# Altium PCB PCB2.PcbDoc
Units mm, origin at the board's own origin, x right, y up, seen from the top; angles counter-clockwise.
Board outline 65 x 100 mm, 2 copper layers (Top Layer, Bottom Layer); 43 components, 36 nets, 170 pads, 99 vias.
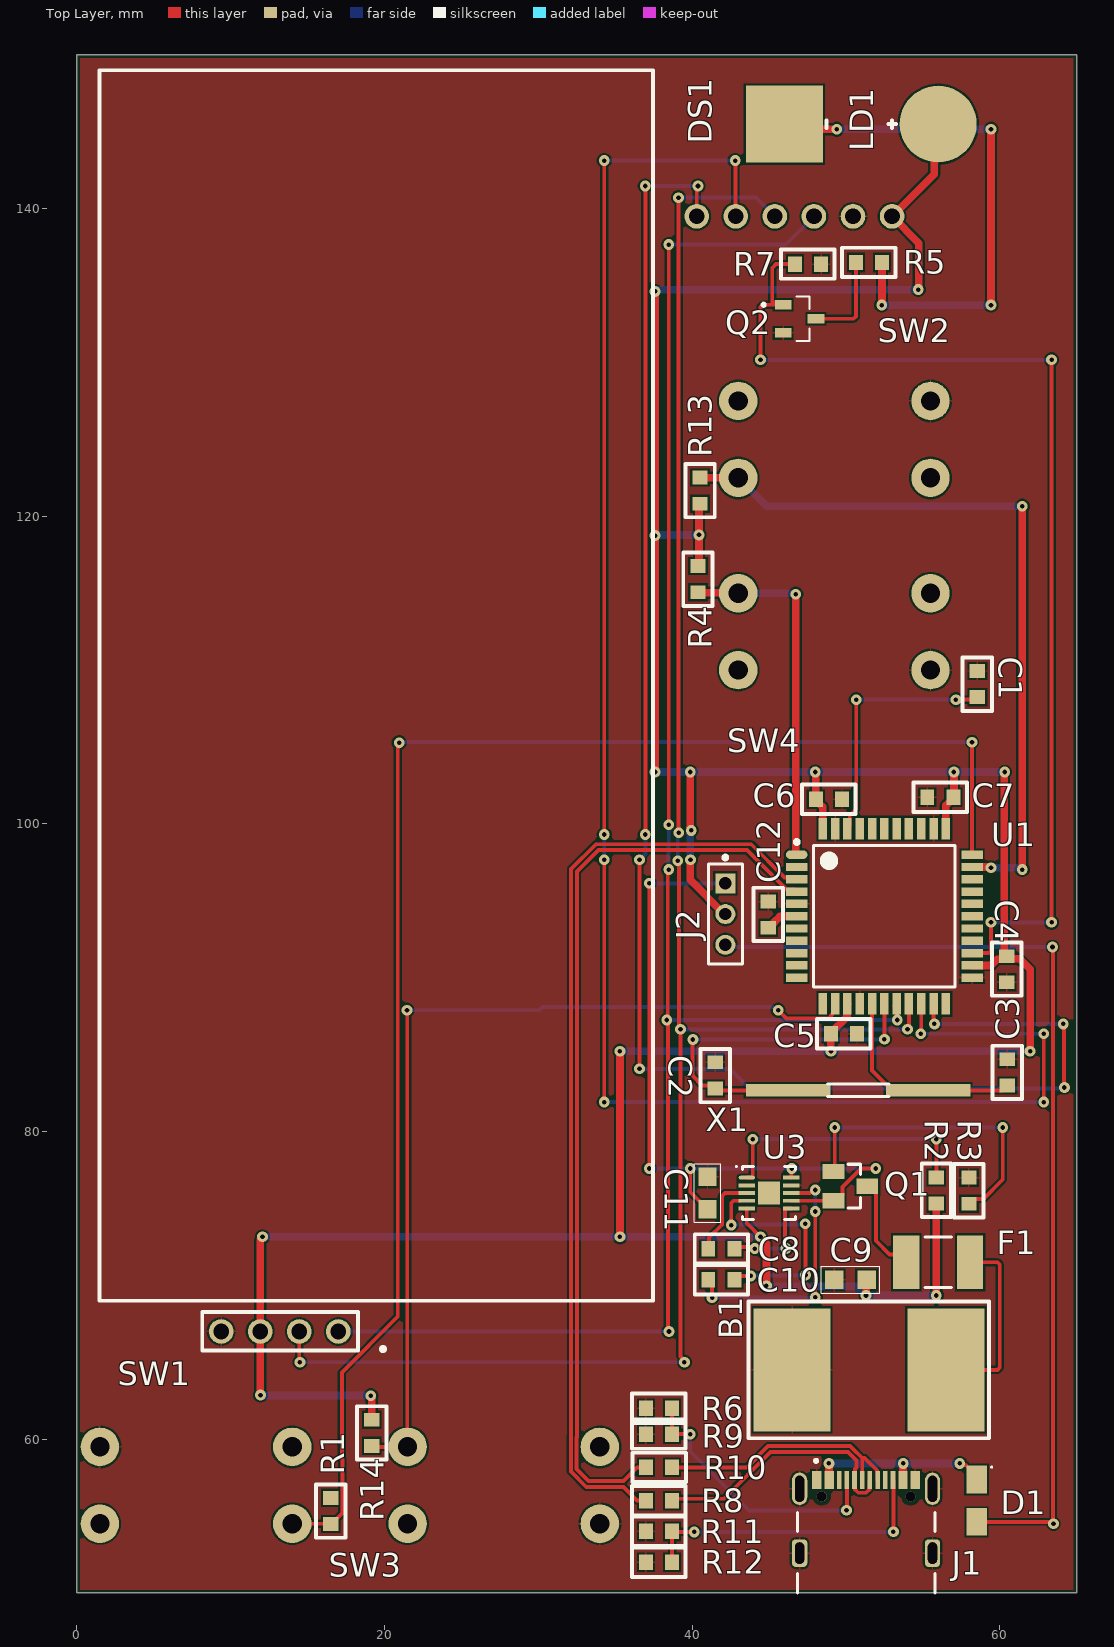
[diagram p0: Top Layer view]
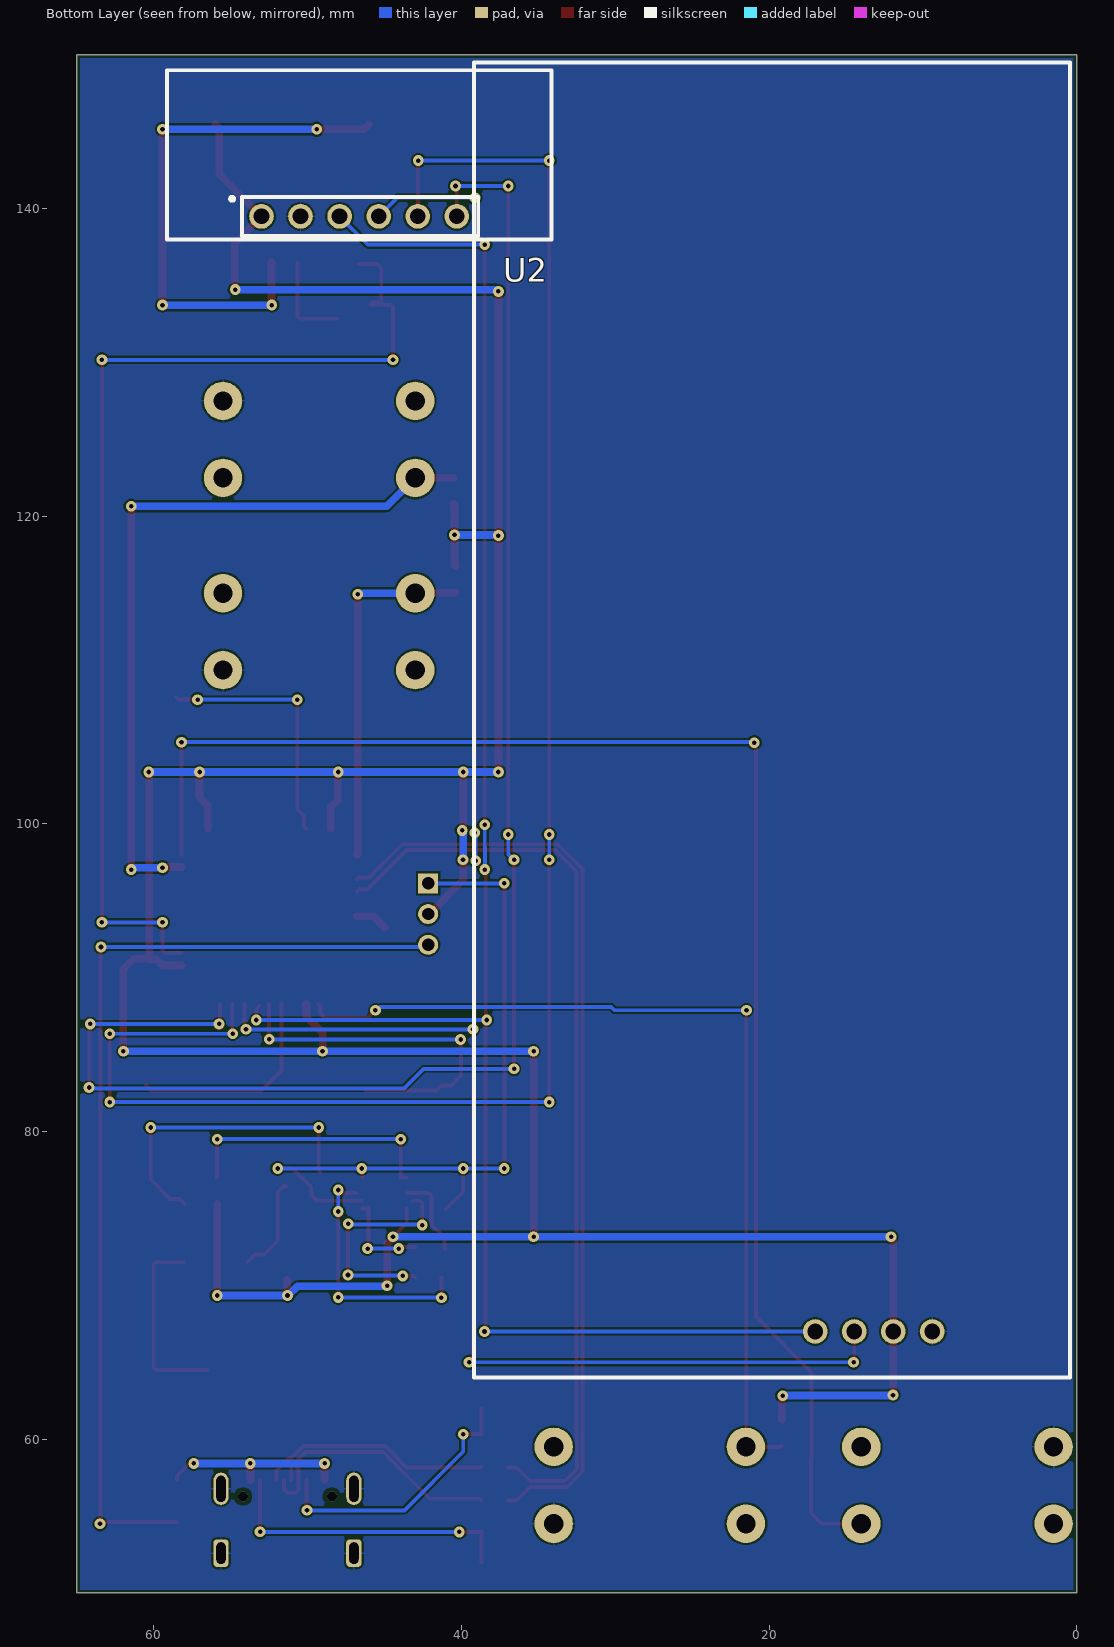
[diagram p1: Bottom Layer view, seen from below]
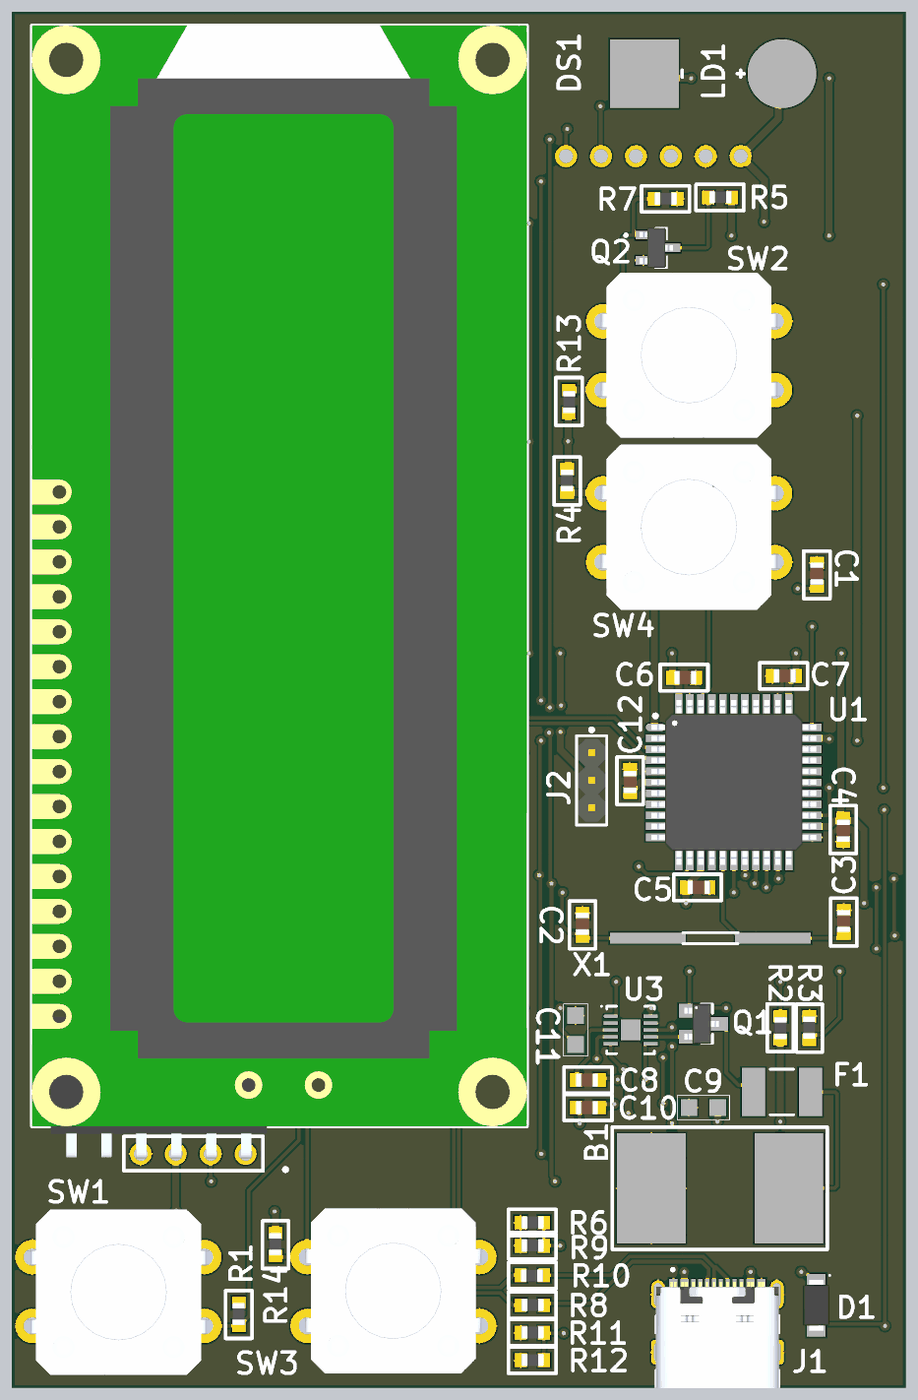
[diagram p2: 3D render of the assembled board from above, using the file's embedded part models]

## Layer stack, top to bottom
Top Solder: solder mask 0.0102, Solder Resist, Dk 3.5
Top Layer: signal copper 0.0356
Dielectric 1: dielectric 0.32, FR-4, Dk 4.8
Bottom Layer: signal copper 0.0356
Bottom Solder: solder mask 0.0102, Solder Resist, Dk 3.5

## Board outline
0,50 65,50 65,150 0,150

## Design rules (kind name [scope] priority, off if disabled: settings)
BoardOutlineClearance [All] p1: gap=0.2 ignorepadtopadclearanceinfootprint=FALSE
Clearance [All] p1: gap=0.127 ignorepadtopadclearanceinfootprint=TRUE except(0.254: Arc-Hole Track-Hole SMDPad-Hole THPad-Hole Via-Hole Fill-Hole Poly-Hole Region-Hole Text-Hole)
ComponentClearance [All] p1: gap=0.127 collisioncheckmode=3 verticalgap=0.127 showdistances=TRUE
DiffPairsRouting [All] p1: maxlimit=0.254 minlimit=0.127 mostfreqgap=0.127 toplayer_minwidth=0.127 toplayer_maxwidth=25.4 toplayer_prefwidth=0.127 bottomlayer_minwidth=0.127 bottomlayer_maxwidth=25.4 bottomlayer_prefwidth=0.127 maxuncoupledlength=12.7
Height [All] p1: minheight=0 maxheight=1816.048 prefheight=12.7
HoleSize [All] p1: absolutevalues=TRUE maxlimit=6.3 minlimit=0.3 maxpercent=80.000 minpercent=20.000
HoleToHoleClearance [All] p1: gap=0.254 allowstackedmicrovias=FALSE
MinimumAnnularRing [All] p1: minimumring=0.152
MinimumSolderMaskSliver [All] p1: minsoldermaskwidth=0.152
PlaneClearance [All] p1: clearance=0.127
PlaneConnect PlaneConnectPowerPads [InPadClass('PowerPads')] p1: planeconnectstyle=Direct reliefexpansion=0.508 reliefentries=4 reliefconductorwidth=0.254 reliefairgap=0.254
PlaneConnect [All] p2: pad.planeconnectstyle=Relief pad.reliefexpansion=0.3 pad.reliefentries=4 pad.reliefconductorwidth=0.127 pad.reliefairgap=0.127 via.planeconnectstyle=Direct via.reliefexpansion=0.3 via.reliefentries=4 via.reliefconductorwidth=0.127 via.reliefairgap=0.127
PolygonConnect PolygonConnectPowerPads [All vs (InPadClass('PowerPads'))] p1: connectstyle=Direct reliefconductorwidth=0.254 reliefentries=4 polygonreliefangle="90 Angle" airgapwidth=0.254
PolygonConnect [All] p2: thpad.connectstyle=Relief thpad.reliefconductorwidth=0.127 thpad.reliefentries=4 thpad.polygonreliefangle="90 Angle" thpad.airgapwidth=0.127 smdpad.connectstyle=Relief smdpad.reliefconductorwidth=0.127 smdpad.reliefentries=4 smdpad.polygonreliefangle="90 Angle" smdpad.airgapwidth=0.127 via.connectstyle=Direct via.reliefconductorwidth=0.127 via.reliefentries=4 via.polygonreliefangle="90 Angle" via.airgapwidth=0.127
RoutingVias [All] p1: holewidth=0.3 width=0.6 viastyle="Through Hole" minholewidth=0.3 minwidth=0.6 maxholewidth=0.6 maxwidth=6.6
SilkToSilkClearance [All] p1: silktosilkclearance=0.127
SilkToSolderMaskClearance [IsPad] p1: minsilkscreentomaskgap=0.127 clearancetoexposedcopper=TRUE
SolderMaskExpansion [All] p1: expansion=0.051 istentingtop=FALSE
SupplyNets "Schematic Supply Nets_1" [InNet('PINH_Vout')] p1: voltage=0.000
SupplyNets "Schematic Supply Nets" [InNet('PINH_SVR')] p2: voltage=0.000
SupplyNets "Schematic Supply Nets_3" [InNet('GND')] p3: voltage=0.000
UnRoutedNet [All] p1: checkbadconnections=TRUE
Width Width_10mil [All] p1: maxlimit=25.4 minlimit=0.254 preferedwidth=0.254 minimp=50.000000 maximp=50.000000 favimp=50.000000
Width Width_6mil [All] p2: maxlimit=25.4 minlimit=0.152 preferedwidth=0.152 minimp=50.000000 maximp=50.000000 favimp=50.000000
Width Power_20mil [All] p3: maxlimit=25.4 minlimit=0.508 preferedwidth=0.508 minimp=50.000000 maximp=50.000000 favimp=50.000000
Width Power_12mil [All] p4: maxlimit=25.4 minlimit=0.305 preferedwidth=0.305 minimp=50.000000 maximp=50.000000 favimp=50.000000
Width Width_5mil [All] p5: maxlimit=25.4 minlimit=0.127 preferedwidth=0.127 minimp=50.000000 maximp=50.000000 favimp=50.000000
19 further rules are at their usual default settings.

## Classes and differential pairs
component class randcomponenten: B1 C8 C9 C10 C11 D1 DS1 F1 J1 J2 LD1 Q1 Q2 R1 R2 R3 R4 R5 R6 R7 R8 R9 R10 R11 R12 R13 R14 SW1 SW2 SW3 SW4 U2 U3
component class chip: C1 C2 C3 C4 C5 C6 C7 C12 U1 X1
differential pair D': +D'_P -D'_N
differential pair D: +D_P -D_N

## Components (designator, comment, footprint, x,y, rotation, side; value= is the part's Value field where it differs from the comment)
B1 "2xAA" BATTERIJHOUDER 56.5,64.5 r90 top
C1 "CAP_100nF" CAP_100nF 58.547,109.093 r90 top
C2 "CAP_18pF" CAP_18pF 41.5,83.65 r90 top
C3 "CAP_18pF" CAP_18pF 60.5,83.85 r90 top
C4 "CAP_100nF" CAP_100nF 60.452,90.551 r270 top
C5 "CAP_100nF" CAP_100nF 49.872,86.36 r0 top
C6 "CAP_100nF" CAP_100nF 48.895,101.6 r0 top
C7 "CAP_100nF" CAP_100nF 56.134,101.727 r0 top
C8 "CAP_1uF" CAP_1uF 41.896,72.373 r180 top
C9 "CAP_10uF" CAP_10uF 50.292,70.358 r0 top
C10 "CAP_1uF" CAP_1uF 41.896,70.373 r180 top
C11 "CAP_10uF" CAP_10uF 41,76 r270 top
C12 "CAP_1uF" CAP_1uF 44.952,94.104 r270 top
D1 "DFLS120LQ-7" SDIODE 58.5,56 r270 top
DS1 "LCD" LCD3V3 13.19,67 r90 top
F1 "MINIASMDC075F/33-2" RESC4632X15M 56,71.5 r180 top
J1 "USBConnector" USBC 51.31,54.966 r0 top
J2 "NRPN031PAEN-RC" FP-NRPN031PAEN-RC-MFG 42.164,94.139 r270 top
LD1 "Laser" laser 51,145.5 r90 top
Q1 "FDN304P" FDN304P 50.292,76.454 r270 top
Q2 "DMN2056U7" DMN2056U-7 46.99,132.842 r0 top
R1 "RES_10KR" RES_10KR 16.51,55.333 r90 top
R2 "RES_10KR" RES_10KR 55.88,76.161 r270 top
R3 "RES_100KR" RES_100KR 60.21,75.337 r90 top
R4 "RES_10KR" RES_10KR 40.513,121.666 r270 top
R5 "RES_22R" RES_22R 51.5,136.5 r0 top
R6 "RES_10KR" RES_10KR 37.85,62 r0 top
R7 "RES_10KR" RES_10KR 47.537,136.398 r0 top
R8 "RES_22R" RES_22R 37.85,56 r0 top
R9 "RES_10KR" RES_10KR 37.846,60.325 r0 top
R10 "RES_22R" RES_22R 37.846,58.166 r180 top
R11 "RES_10KR" RES_10KR 37.85,54 r0 top
R12 "RES_10KR" RES_10KR 37.85,52 r0 top
R13 "RES_10KR" RES_10KR 40.386,115.912 r90 top
R14 "RES_10KR" RES_10KR 19.177,60.413 r90 top
SW1 "Button" BUTTON 0.906,51.112 r0 top
SW2 "Button" BUTTON 56.094,130.888 r180 top
SW3 "Button" BUTTON 34.594,62.888 r180 top
SW4 "Button" BUTTON 56.094,118.388 r180 top
U1 "ATmega32u4" Atmega32u4 52.5,94 r0 top
U2 "Sensor" Vl53l1x 46.65,139.5 r180 bottom
U3 "MCP1256T" MCP1256T 45,76 r0 top
X1 "HC49SSDLF" Xtal_HC49SSDLF 50.8,82.677 r0 top

## Footprints (in the part's own frame and the unit in brackets; to place one, negate y for a bottom-side part, rotate by r counter-clockwise, add the part's x,y. Pads: shape width x height; smd on the part's side, far side on the other; paste and mask are expansions set on the pad)
Atmega32u4 [mm] "TQFP, 44-Leads, Body 10.00x10.00mm, Pitch 0.80mm, Thermal Pad 4.60x4.60mm, IPC Medium Density"
  oval 1.4x0.55 smd: 1(-5.7,4)
  rect 1.4x0.55 smd: 2(-5.7,3.2) 3(-5.7,2.4) 4(-5.7,1.6) 5(-5.7,0.8) 6(-5.7,0) 7(-5.7,-0.8) 8(-5.7,-1.6) 9(-5.7,-2.4) 10(-5.7,-3.2) 11(-5.7,-4) 23(5.7,-4) 24(5.7,-3.2) 25(5.7,-2.4) 26(5.7,-1.6) 27(5.7,-0.8) 28(5.7,0) 29(5.7,0.8) 30(5.7,1.6) 31(5.7,2.4) 32(5.7,3.2) 33(5.7,4)
  rect 0.55x1.4 smd: 12(-4,-5.7) 13(-3.2,-5.7) 14(-2.4,-5.7) 15(-1.6,-5.7) 16(-0.8,-5.7) 17(0,-5.7) 18(0.8,-5.7) 19(1.6,-5.7) 20(2.4,-5.7) 21(3.2,-5.7) 22(4,-5.7) 34(4,5.7) 35(3.2,5.7) 36(2.4,5.7) 37(1.6,5.7) 38(0.8,5.7) 39(0,5.7) 40(-0.8,5.7) 41(-1.6,5.7) 42(-2.4,5.7) 43(-3.2,5.7) 44(-4,5.7)
  silkscreen extent -5.82,-4.6 4.6,4.95, body extent -6,-6 6,6, height 1.2
BATTERIJHOUDER [mm]
  rect 8x5 smd: 1(0,0) 2(0,10)
  silkscreen extent -4.45,-2.79 4.44,12.83
BUTTON [mm]
  round 2.5 hole 1.25: 1(0.594,8.388) 2(13.094,8.388) 3(0.594,3.388) 4(13.094,3.388)
  body extent -0.14,-0.16 13.86,11.84, height 7.2
CAP_1uF [mm]
  rect 0.9x1 smd paste-2539.97: 1(-0.85,0) 2(0.85,0)
  silkscreen extent -1.75,-0.95 1.73,0.96, body extent -0.72,-0.48 0.88,0.5, height 0.8
CAP_10uF [mm]
  rect 1.2x1.2 smd: 1(-1.05,0) 2(1.05,0)
  silkscreen extent -1.9,-0.87 1.9,0.87
CAP_18pF [mm]
  rect 0.9x1 smd paste-2539.97: 1(-0.85,0) 2(0.85,0)
  silkscreen extent -1.75,-0.95 1.73,0.96, body extent -0.72,-0.48 0.88,0.5, height 0.8
CAP_100nF [mm]
  rect 0.9x1 smd paste-2539.97: 1(-0.85,0) 2(0.85,0)
  silkscreen extent -1.75,-0.95 1.73,0.96, body extent -0.72,-0.48 0.88,0.5, height 0.8
DMN2056U-7 [mm] "N-Mosfet"
  rect 1.09x0.61 smd paste+0 mask+0.102: D2(1.07,0) G1(-1.07,0.915) S3(-1.07,-0.915)
  silkscreen extent -2.44,-1.45 0.65,1.45, body extent -1.33,-1.45 1.07,1.45, height 1.14
FDN304P [mm] "P-Mosfet"
  rect 1x1.4 smd: D2(0,1.1) G1(-0.95,-1.1) S3(0.95,-1.1)
  silkscreen extent -1.42,-0.15 1.42,0.66, body extent -1.46,-1.38 1.46,1.13, height 1.12
FP-NRPN031PAEN-RC-MFG [mm]
  rect 1.3x1.3 hole 0.8 paste-2539.97 mask+0: 1(-2,0)
  round 1.3 hole 0.8 paste-2539.97 mask+0: 2(0,0) 3(2,0)
  silkscreen extent -3.8,-1.1 3.25,1.1, body extent -3.35,-1.2 3.35,1.2, height 0.25
laser [mm]
  round 5 smd: 1(0,-5)
  rect 5x5 smd: 2(0,5)
  silkscreen extent -0.25,-2.25 0.25,2.25
LCD3V3 [mm] "Pinheader 4pin 90° vr LCD"
  round 1.6 hole 1.02: 1(0,-3.81) 2(0,-1.27) 3(0,1.27) 4(0,3.81)
  silkscreen extent -1.27,-24.27 82,11.73, body extent -0.32,-24.27 82,11.73, height 11.9
MCP1256T [mm] "SON, 10-Leads, Body 3.00x3.00mm, Pitch 0.50mm, Thermal Pad 1.50x1.44mm, IPC Low Density"
  oval 1.05x0.25 smd: 1(-1.445,1)
  rect 1.05x0.25 smd: 2(-1.445,0.5) 3(-1.445,0) 4(-1.445,-0.5) 5(-1.445,-1) 6(1.445,-1) 7(1.445,-0.5) 8(1.445,0) 9(1.445,0.5) 10(1.445,1)
  rect 1.44x1.5 smd: 11(0,0)
  silkscreen extent -2.17,-1.73 1.72,1.77, body extent -1.58,-1.58 1.57,1.58, height 1
RES_10KR [mm]
  rect 0.9x1 smd paste-2539.97: 1(-0.85,0) 2(0.85,0)
  silkscreen extent -1.75,-0.95 1.73,0.96, body extent -0.77,-0.43 0.83,0.47, height 0.81
RES_22R [mm]
  rect 0.9x1 smd paste-2539.97: 1(-0.85,0) 2(0.85,0)
  silkscreen extent -1.75,-0.95 1.73,0.96, body extent -0.77,-0.43 0.83,0.47, height 0.81
RES_100KR [mm]
  rect 0.9x1 smd paste-2539.97: 1(-0.037,2.21) 2(1.663,2.21)
  silkscreen extent -0.93,1.26 2.54,3.17, body extent 0.04,1.78 1.64,2.68, height 0.81
RESC4632X15M [mm] "Chip Resistor, 2-Leads, Body 4.55x3.24mm, IPC Low Density"
  rect 1.7x3.5 smd: 1(-2.075,0) 2(2.075,0)
  silkscreen extent -0.85,-1.65 0.85,1.65, body extent -2.36,-1.71 2.36,1.7, height 1.46
SDIODE [mm] "DFLS120LQ-7"
  rect 1.8x1.35 smd: 1(-1.375,0) 2(1.375,0)
  silkscreen extent -2.22,0.93 -2.13,1.02, body extent -1.85,-0.96 1.85,0.96, height 1
USBC [mm]
  rect 0.6x1.15 smd: A1_B12(-3.2,2.378) A4_B9(-2.4,2.378) B1_A12(3.2,2.378) B4_A9(2.4,2.378)
  rect 0.3x1.15 smd: A5(-1.25,2.378) A6(-0.25,2.378) A7(0.25,2.378) A8(1.25,2.378) B5(1.75,2.378) B6(0.75,2.378) B7(-0.75,2.378) B8(-1.75,2.378)
  rrect50% 1x1.8 hole 0.6 slot 1.4 at 90 deg: SH1(-4.32,-2.377) SH1(4.32,-2.377)
  oval 1x2.1 hole 0.6 slot 1.7 at 90 deg: SH1(-4.32,1.803) SH1(4.32,1.803)
  round 0.65 hole 0.65 unplated: ""(-2.89,1.303) ""(2.89,1.303)
  silkscreen extent -4.47,-4.98 4.47,3.72, body extent -4.47,-4.98 4.47,2.73, height 3.31
Vl53l1x [mm] "Sensor pinheader"
  round 1.6 hole 1.02: 1(-6.35,0) 2(-3.81,0) 3(-1.27,0) 4(1.27,0) 5(3.81,0) 6(6.35,0)
  silkscreen extent -12.5,-1.5 12.5,9.5
Xtal_HC49SSDLF [mm] "8MHz"
  rect 5.5x0.8 smd: 1(-4.55,0) 2(4.55,0)
  silkscreen extent -2,-0.4 2,0.4, body extent -6.75,-2.5 6.75,2.5, height 2

## Part data
B1: "Batterijhouder"
D1: "Schottky Diode"
F1: "Fuse"
J2: library part CMP-25680-000021-1, "CONN HEADER VERT 3POS 2MM", Current Rating=2A, Manufacturer=Sullins, Package=0, Temperature="-40°C to +105°C", Temperature Range High=+105°C, Temperature Range Low=-40°C, Voltage Rating=150V, Automotive=No, Category=Conn, ComponentLink2Description=Datasheet, ComponentLink2URL=https://drawings-pdf.s3.amazonaws.com/10531.pdf, Conn Gender=Male, Conn Orientation=Straight, Contact Material=Gold,Nickel, Device Class L1=Connectors, Device Class L2="Headers and Wire Housings", Device Class L3=unset, Digikey Description="CONN HEADER VERT 3POS 2MM", Height=6mm, Lead Free=Yes, Manufacturer Part Number=NRPN031PAEN-RC, Number Of Contacts=3, Number Of Rows=1, Octopart=https://octopart.com/nrpn031paen-rc-sullins-12817732, Pitch=2mm, RoHS=TRUE
Q1: "p-mosfet"
Q2: "n-mosfet"
U3: "Switching Voltage Regulator"
X1: library part XTAL_8MHz

## Via types
v1: diameter 0.7, hole 0.3, Top Layer to Bottom Layer, tented both sides, 99 vias

## Nets (pads, with @x,y where several pads share a name; then routed paths per layer and width w, separated by ;. In a path a pad name is that pad's centre, name@x,y a point inside that pad or via, vN(x,y) a via of type N, cw(c..) or ccw(c..) an arc to the next point about the centre after c; other vN are vias at no path point)
D'_N: R8.1 U1.3 | length 61.1
  Top Layer w0.254: R8.1 36.423,56 35.531,56.892 33.116,56.892 32.115,57.894 32.115,60.281 32.131,60.297 32.131,97.059 33.751,98.679 43.846,98.679 45.998,96.527 46.673,96.527 U1.3
D'_P: R10.2 U1.4 | length 60
  Top Layer w0.254: R10.2 36.419,58.166 35.526,57.273 33.274,57.273 32.496,58.051 32.496,60.123 32.512,60.139 32.512,96.901 33.909,98.298 43.568,98.298 46.139,95.727 46.673,95.727 U1.4
D_N: J1.A7 J1.B7 R8.2 | length 17.2
  Top Layer w0.254: R8.2 38.827,56.127 42.061,56.127 45.1,59.167 50.127,59.167 50.679,58.615 50.679,58.165 50.583,58.069 50.583,56.737 50.805,56.515 51.315,56.515 51.537,56.737 51.537,57.321 J1.A7
D_P: J1.A6 J1.B6 R10.1 | length 16.6
  Top Layer w0.254: R10.1 43.561,58.166 44.943,59.548 50.285,59.548 50.396,59.436 51.06,58.772 ; J1.A6 51.06,58.772 ; J1.B6 52.037,57.367 52.037,57.951 51.216,58.772 51.06,58.772
GND: B1.2 C1.2 C2.2 C3.2 C4.2 C5.2 C6.2 C7.1 C9.1 C11.1 C12.1 DS1.4 J1.A1_B12 J1.B1_A12 J1.SH1 Q2.S3 R3.2 R6.1 R7.2 R9.1 R11.1 R12.1 SW1.1 SW2.3 SW3.1 SW4.1 U1.5 U1.15 U1.23 U1.35 U1.43 U2.2 U3.9
NetB1_1: B1.1 F1.1 | length 12.3
  Top Layer w0.254: B1.1 59.851,64.5 60,64.649 60,71.351 59.851,71.5 F1.1
NetC1_1: C1.1 U1.42 | length 16.6
  Top Layer w0.254: U1.42 50.248,99.848 50.248,100.54 50.673,100.965 v1(50.673,108.077) ; v1(57.15,108.077) 58.381,108.077 C1.1
  Bottom Layer w0.254: v1(50.673,108.077) v1(57.15,108.077)
NetC2_1: C2.1 U1.17 X1.1 | length 23.7
  Top Layer w0.254: v1(40.05,85.986) 40.014,85.95 40.014,83.636 40.65,83 41.3,83 C2.1 41.623,82.677 X1.1 ; v1(52.5,86) U1.17
  Bottom Layer w0.254: v1(40.05,85.986) 40.057,85.993 v1@52.493,85.993
NetC3_1: C3.1 U1.16 X1.2 | length 13.8
  Top Layer w0.254: U1.16 51.7,83.977 53,82.677 X1.2 60.177,82.677 C3.1
NetC8_1: C8.1 U3.6 | length 6.2
  Top Layer w0.254: C8.1@43,72.5 43.798,72.5 43.823,72.475 43.984,72.475 v1(44.069,72.39) ; v1(46.101,72.39) 46.047,72.444 46.047,74.998 46.049,75 U3.6
  Bottom Layer w0.254: v1(44.069,72.39) v1(46.101,72.39)
NetC8_2: C8.2 U3.3 | length 5.5
  Top Layer w0.254: C8.2 41.105,72.432 41.105,73.105 41.941,73.941 41.941,75.792 42.149,76 U3.3
NetC10_1: C10.1 U3.4 | length 14.7
  Top Layer w0.254: v1(42.545,73.914) 42.545,75.349 42.694,75.498 U3.4@43.157,75.498 ; C10.1@43,70.5 43.112,70.612 v1(43.815,70.612) ; v1(47.351,74) 47.361,73.99 47.361,70.679 v1(47.371,70.669)
  Bottom Layer w0.254: v1(42.545,73.914) 42.588,73.957 47.308,73.957 v1(47.351,74) ; v1(43.815,70.612) 43.844,70.641 47.342,70.641 v1(47.371,70.669)
NetC10_2: C10.2 U3.8 | length 16.2
  Top Layer w0.254: v1(41.3,69.2) C10.2@41.3,70.5 ; U3.8@46.843,75.998 46.847,75.994 47.679,75.994 47.885,76.2 v1(48.006,76.2) ; v1(48.006,69.215) v1(48.006,74.803)
  Bottom Layer w0.254: v1(41.3,69.2) 47.991,69.2 v1(48.006,69.215) ; v1(48.006,74.803) v1(48.006,76.2)
NetC12_2: C12.2 U1.6 | length 2.2
  Top Layer w0.5: C12.2 45.002,93.254 45.325,93.577 45.325,93.606 45.719,94 U1.6
NetD1_1: D1.1 J1.A4_B9 J1.B4_A9 | length 12.3
  Top Layer w0.254: v1(48.895,58.42) v1@48.902,58.413 ; J1.A4_B9@48.902,57.352 J1.A4_B9 ; v1(57.404,58.42) 57.489,58.335 57.765,58.335 58.5,57.6 D1.1
  Top Layer w0.5: J1.A4_B9@48.902,57.352 v1@48.902,58.413 ; J1.B4_A9 53.715,57.349 53.715,58.414 v1(53.721,58.42)
  Bottom Layer w0.5: v1(48.895,58.42) v1(53.721,58.42) v1(57.404,58.42)
NetDS1_1: DS1.1 U1.18 U2.3 | length 118.3
  Top Layer w0.254: v1(38.481,97.028) 38.417,96.965 38.417,87.312 v1(38.354,87.249) 38.427,87.176 38.427,67.206 38.484,67.149 v1@38.5,67.149 ; v1(38.481,99.949) v1(38.481,137.668) ; U1.18@53.152,88.152 53.32,87.984 53.32,87.269 v1(53.34,87.249)
  Bottom Layer w0.254: DS1.1 v1(38.5,67) ; v1(38.354,87.249) v1(53.34,87.249) ; v1(38.481,97.028) 38.463,97.046 38.463,98.488 38.481,98.506 v1(38.481,99.949) ; v1(38.481,137.668) 46.088,137.668 U2.3
NetDS1_2: DS1.2 U1.19 U2.4 | length 126.1
  Top Layer w0.254: DS1.2 14.46,65.04 v1(14.5,65) ; v1(39.067,97.611) 39.152,97.526 39.152,87.113 39.158,87.108 39.158,86.73 v1(39.243,86.645) ; v1(39.116,140.716) 39.121,140.711 39.121,99.438 v1(39.127,99.432) ; v1@39.274,86.645 39.243,86.614 39.243,65.378 39.5,65.121 v1(39.5,65) ; v1@54.1,86.749 U1.19
  Bottom Layer w0.254: v1(14.5,65) v1(39.5,65) ; v1(39.067,97.611) 39.067,99.392 39.116,99.441 39.118,99.441 v1(39.127,99.432) ; v1(39.116,140.716) 44.164,140.716 U2.4 ; v1(39.243,86.645) 53.996,86.645 v1(54.003,86.651)
NetF1_2: F1.2 Q1.D2 | length 6.4
  Top Layer w0.254: Q1.D2 51.57,76.454 51.943,76.081 51.943,72.898 52.843,71.998 53.427,71.998 F1.2
NetJ1_A5: J1.A5 R6.2 R9.2 | length 17.7
  Top Layer w0.254: R6.2 38.696,61.996 R9.2 v1(39.878,60.325) ; v1(50.038,55.372) 50.06,55.394 J1.A5
  Bottom Layer w0.254: v1(39.878,60.325) 39.878,59.203 43.709,55.372 v1(50.038,55.372)
NetJ1_A8: J1.A8
NetJ1_B5: J1.B5 R11.2 R12.2 | length 19.8
  Top Layer w0.254: R12.2 R11.2 38.732,53.968 v1(40.137,53.968) ; J1.B5 53.083,57.321 53.083,56.776 53.086,56.773 v1(53.086,53.975)
  Bottom Layer w0.254: v1(40.137,53.968) 40.14,53.972 53.083,53.972 v1(53.086,53.975)
NetJ1_B8: J1.B8
NetLD1_2: LD1.2 R5.2 | length 34.9
  Top Layer w0.5: LD1.2 46.339,145.161 v1@49.357,145.161 ; v1(52.324,133.731) 52.324,133.858 52.35,133.884 R5.2 ; v1(59.436,133.731) v1(59.436,145.161)
  Bottom Layer w0.5: v1(49.403,145.161) v1(59.436,145.161) ; v1(52.324,133.731) v1(59.436,133.731)
NetQ1_G1: Q1.G1 R3.1 | length 20.1
  Top Layer w0.254: Q1.G1 49.276,77.488 v1(49.276,80.264) ; R3.1 58.323,75.623 58.951,75.623 60.198,76.87 v1(60.198,80.264)
  Bottom Layer w0.254: v1(49.276,80.264) v1(60.198,80.264)
NetQ2_D2: Q2.D2 R5.1 | length 6.2
  Top Layer w0.254: Q2.D2 50.501,132.842 50.65,132.991 R5.1
NetQ2_G1: Q2.G1 R7.1 U1.25 | length 72.1
  Top Layer w0.254: v1(44.45,130.175) 44.45,133.608 44.599,133.757 Q2.G1 45.771,133.906 45.212,133.906 45.212,136.144 45.466,136.398 R7.1 ; U1.25 59.287,91.6 59.436,91.749 v1(59.436,93.599) ; v1(63.373,93.599) v1(63.373,130.175)
  Bottom Layer w0.254: v1(44.45,130.175) v1(63.373,130.175) ; v1(59.436,93.599) v1(63.373,93.599)
NetR1_1: R1.1 SW1.4 U1.33 | length 99.8
  Top Layer w0.254: SW1.4 16.493,54.5 R1.1 16.56,54.483 17.264,55.187 17.264,58.666 17.226,58.705 17.226,64.343 20.859,67.976 20.859,104.911 20.87,104.922 20.87,105.198 v1(20.955,105.283) ; v1(58.196,105.314) 58.166,105.284 58.166,105.283 58.2,105.249 U1.33
  Bottom Layer w0.254: v1(20.955,105.283) 20.986,105.314 v1(58.196,105.314)
NetR2_1: R2.1 U3.1 | length 17.3
  Top Layer w0.254: U3.1 43.94,77 43.942,77.002 v1(43.942,79.502) ; R2.1 v1(55.88,79.502)
  Bottom Layer w0.254: v1(43.942,79.502) v1(55.88,79.502)
NetR4_1: R4.1 SW2.2 U1.32 | length 48.7
  Top Layer w0.5: R4.1 40.521,122.508 42.992,122.508 SW2.2 ; U1.32 59.391,97.2 v1(59.436,97.155) ; v1(61.468,97.028) v1(61.468,120.65)
  Bottom Layer w0.5: SW2.2 44.85,120.65 v1(61.468,120.65) ; v1(59.436,97.155) 61.287,97.155 61.414,97.028 v1(61.468,97.028)
NetR13_1: R13.1 SW4.4 U1.1 | length 23.4
  Top Layer w0.5: R13.1 40.417,115.031 42.969,115.031 SW4.4 ; v1(46.736,114.935) 46.736,98.023 46.759,98 U1.1
  Bottom Layer w0.5: SW4.4 46.671,115 v1(46.736,114.935)
NetR14_1: R14.1 SW3.4 U1.13 | length 59.7
  Top Layer w0.254: R14.1 19.24,59.5 SW3.4 21.482,59.518 21.482,87.865 v1(21.463,87.884) ; v1(45.593,87.884) 46.131,87.346 48.88,87.346 49.029,87.495 49.029,87.549 49.152,87.672 49.152,88.152 U1.13
  Bottom Layer w0.254: v1(21.463,87.884) 30.046,87.884 30.269,88.107 45.249,88.107 45.472,87.884 v1(45.593,87.884)
NetU1_20: U1.20 U2.5 | length 116.3
  Top Layer w0.254: v1(34.29,81.915) v1(34.29,97.663) ; v1(34.29,99.314) v1(34.29,143.129) ; v1(42.799,143.129) 42.82,143.108 42.82,139.521 U2.5 ; v1(54.864,86.36) 54.9,86.396 U1.20 ; v1(62.865,81.915) v1(62.865,86.36)
  Bottom Layer w0.254: v1(34.29,81.915) v1(62.865,81.915) ; v1(34.29,97.663) v1(34.29,99.314) ; v1(34.29,143.129) v1(42.799,143.129) ; v1(54.864,86.36) v1(62.865,86.36)
NetU1_21: U1.21 U2.6 | length 105.1
  Top Layer w0.254: v1(36.576,84.074) v1(36.576,97.663) ; v1(36.957,99.314) v1(36.957,141.478) ; U2.6 40.3,141.392 v1(40.386,141.478) ; U1.21 55.7,87.048 v1(55.753,86.995) ; v1(64.135,86.995) 64.17,86.96 64.17,82.894 v1(64.206,82.859)
  Bottom Layer w0.254: v1(36.576,84.074) 42.453,84.074 43.723,82.804 64.151,82.804 v1(64.206,82.859) ; v1(36.576,97.663) 36.957,98.044 v1(36.957,99.314) ; v1(36.957,141.478) v1(40.386,141.478) ; v1(55.753,86.995) v1(64.135,86.995)
PINH_SDiode: D1.2 J2.3 | length 63.8
  Top Layer w0.254: D1.2 63.375,54.625 63.421,54.579 63.467,54.533 v1(63.5,54.5) ; v1(63.434,92) 63.467,91.967 63.467,86.612 63.469,86.61 63.469,86.11 63.467,86.108 63.467,82.167 63.469,82.165 63.469,81.665 63.467,81.663 v1@63.467,54.625
  Bottom Layer w0.254: J2.3 42.303,92 v1(63.434,92)
PINH_SVR: C11.2 J2.1 Q1.S3 U3.7 U3.10 | length 48.6
  Top Layer w0.254: v1(37.211,77.597) v1(37.211,96.139) ; v1(39.878,77.597) 39.878,76.072 C11.2 ; U3.7 47.5,75.5 49.188,75.5 Q1.S3 49.392,75.504 49.765,75.877 49.765,76.386 50.976,77.597 v1(51.943,77.597) ; U3.10 46.445,77.56 v1(46.482,77.597)
  Bottom Layer w0.254: v1(37.211,96.139) J2.1 ; v1@37.22,77.588 40.618,77.588 40.627,77.597 v1(46.482,77.597) v1(51.943,77.597)
PINH_Vout: C4.1 C5.1 C6.1 C7.2 C9.2 DS1.3 J2.2 LD1.1 R2.2 R4.2 R13.2 R14.2 U1.14 U1.24 U1.34 U1.44 U2.1 U3.5 | length 248.5
  Top Layer w0.254: U3.5 43.555,74.047 v1(44.45,73.152)
  Top Layer w0.5: v1(11.938,62.865) 11.929,62.874 11.929,66.991 DS1.3 11.929,67.009 11.929,72.962 12.065,73.098 v1(12.065,73.152) ; v1(19.11,62.816) 19.177,62.883 R14.2 ; v1(35.306,73.152) v1(35.306,85.217) ; v1(37.592,103.378) v1(37.592,134.62) ; v1(39.878,103.378) 39.878,99.577 39.932,99.577 39.933,99.579 v1(39.941,99.579) ; v1(39.892,97.664) 39.891,97.663 39.878,97.663 39.878,96.361 J2.2@42.132,94.107 ; R13.2 40.45,116.825 v1(40.45,118.789) 40.45,120.752 R4.2 ; v1(44.45,73.152) 44.45,73.098 44.831,72.717 v1(44.831,69.977) ; v1(48.006,103.378) 48.045,103.339 C6.1 ; C6.1@48.045,101.55 48.5,101.095 U1.44 ; C5.1 49.022,85.217 49.024,85.215 v1(49.029,85.215) ; C5.1@49.022,86.41 50.075,87.463 50.075,88.275 U1.14 ; v1(51.308,69.342) 51.325,69.359 51.325,70.341 C9.2 ; v1(54.704,134.738) 54.713,134.747 54.737,134.747 54.737,137.763 U2.1 55.75,142.25 55.75,145.25 LD1.1 ; v1(55.88,69.342) R2.2 ; U1.34 56.5,101.193 56.984,101.677 C7.2 57.023,101.766 v1(57.023,103.378) ; U1.24 59.431,90.8 59.832,91.201 60.252,91.201 C4.1 ; v1(60.325,103.378) 60.29,103.343 60.29,91.563 C4.1 ; v1(61.976,85.217) 61.976,90.551 61.294,91.233 60.62,91.233 C4.1
  Bottom Layer w0.5: v1(11.938,62.865) 11.963,62.84 19.085,62.84 v1(19.11,62.816) ; v1(12.065,73.152) v1(35.306,73.152) v1(44.45,73.152) ; v1(35.306,85.217) 35.308,85.215 v1(49.029,85.215) 49.03,85.216 v1(61.976,85.217) v1(61.976,85.217) ; v1@37.509,118.789 v1(40.45,118.789) ; v1(37.592,103.378) v1(48.006,103.378) v1(57.023,103.378) v1(60.325,103.378) ; v1(37.592,134.62) 37.71,134.738 v1(54.704,134.738) ; v1(39.892,97.664) 39.878,97.664 39.878,99.568 39.923,99.568 39.932,99.577 39.939,99.577 v1(39.941,99.579) ; v1(44.831,69.977) 44.866,69.942 50.654,69.942 51.254,69.342 v1(51.308,69.342) v1(55.88,69.342)
  other v1: 37.592,118.745
pads on no net: J1. R1.2 SW1.2 SW1.3 SW2.1 SW2.4 SW3.2 SW3.3 SW4.2 SW4.3 U1.2 U1.7 U1.8 U1.9 U1.10 U1.11 U1.12 U1.22 U1.26 U1.27 U1.28 U1.29 U1.30 U1.31 U1.36 U1.37 U1.38 U1.39 U1.40 U1.41 U3.2 U3.11

## Polygon pours and split planes (outlines as drawn)
GND on Bottom Layer "GND_L02_P001" (solid, remove dead copper, pour order 1): 0,50 65,50 65,150 0,150
GND on Top Layer "GND_L01_P000" (solid, remove dead copper, pour order 0): 0,50 65,50 65,150 0,150

## Silkscreen, mask and mechanical layers (free items; w line width, h text height)
Mechanical 1:
  lines w0.254: 0,50 0,150 65,150 65,50 ; 0.127,50.127 65.127,50.127

## Text inside footprints (layer, text, board x,y; h text height)
J1: Mechanical 13 "PCB EDGE" at 56.71,50.089 h0.41